# Allegro board AVRUSB500.brd
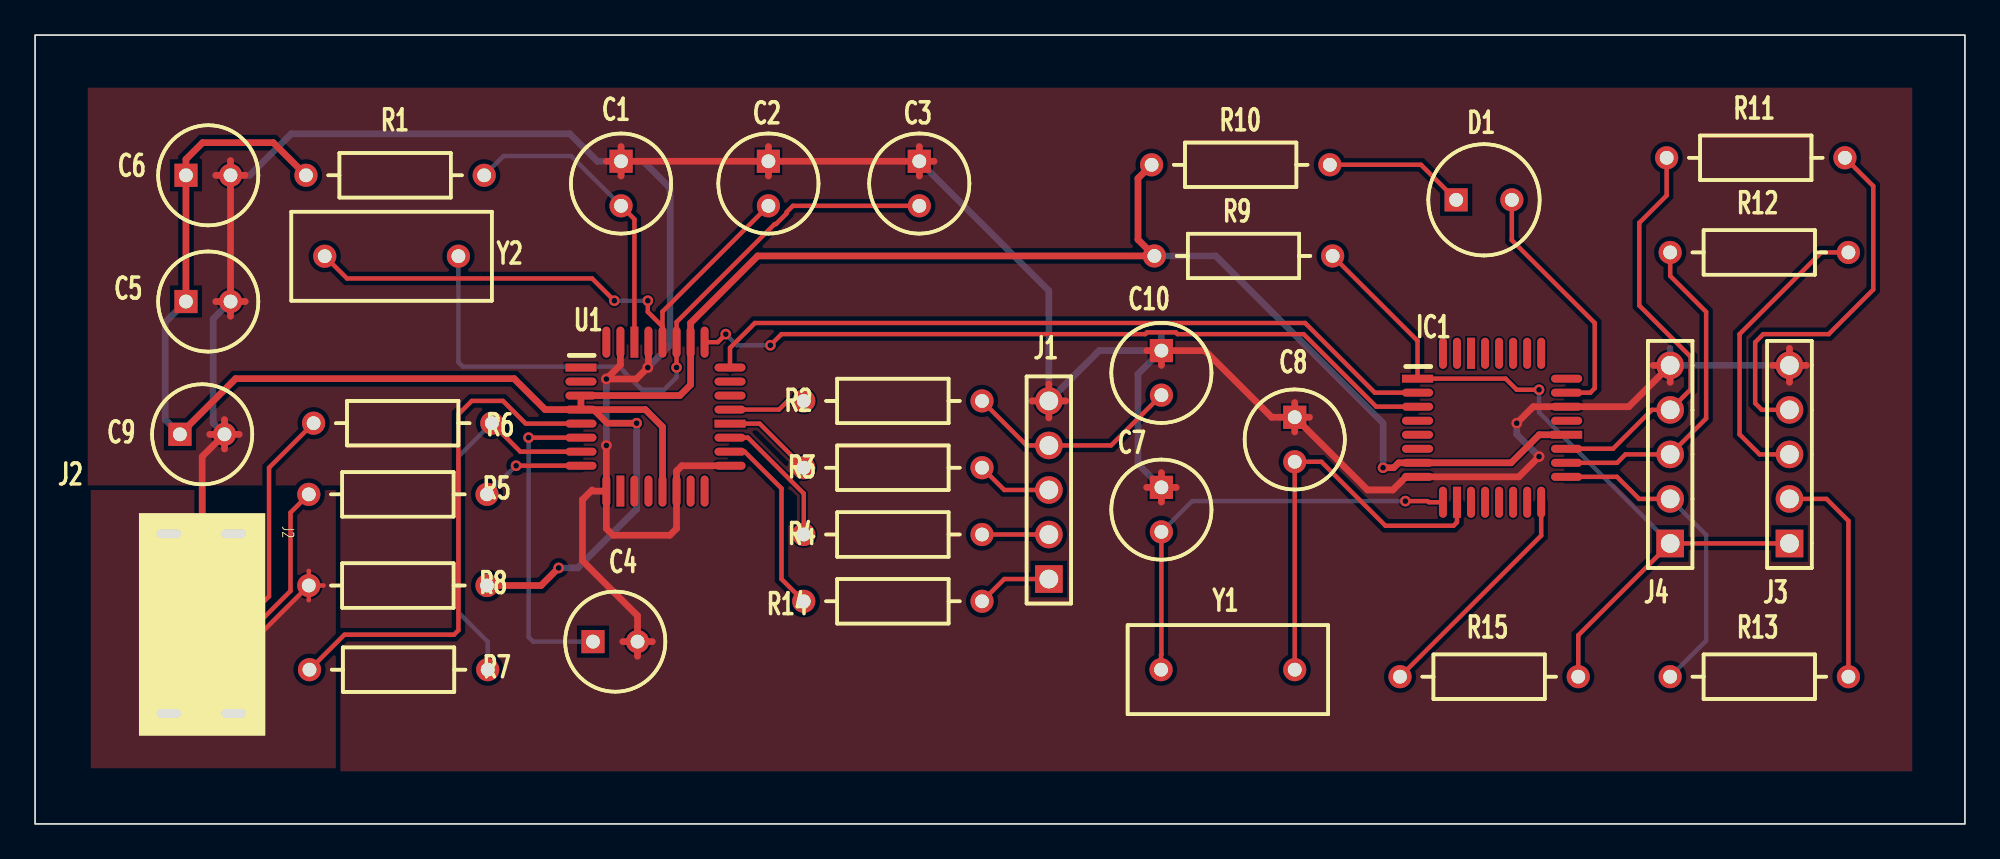
[diagram p0: board, top side]
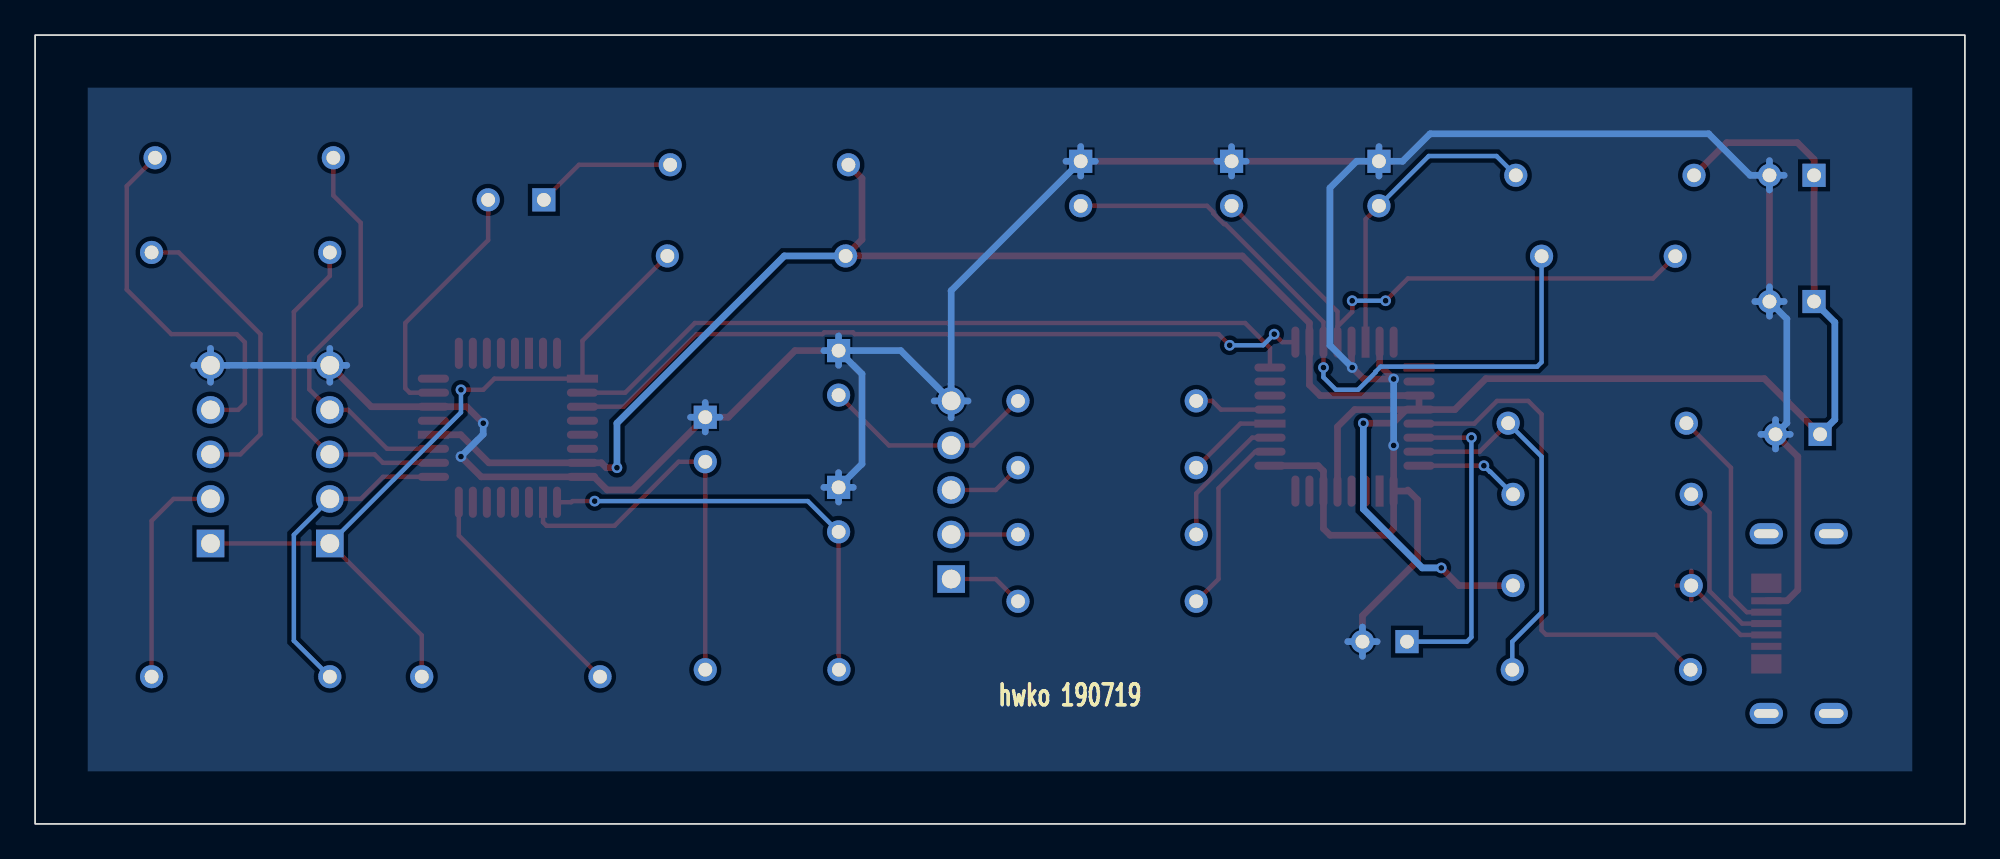
[diagram p1: board, bottom side, seen from below]

Outline 110 x 45 mm; copper layers: TOP, BOTTOM. Coordinates in mm from the lower left corner of the outline.
Outline path: rectangle 0,0 110,45

## Design rules (mm)
net group POWERNETS: nets GND VCC

## Placement (name value [footprint] x y rotation side)
C1  47nF  [CPCYL1D225LS100031]  33.4 37.8 270 top
C2  27pF  [CPCYL1D225LS100031]  41.8 37.8 270 top
C3  27pF  [CPCYL1D225LS100031]  50.4 37.8 270 top
C4  47nF  [CPCYL1D225LS100031]  31.8 10.4 0 top
C5  100nF  [CPCYL1D225LS100031]  8.6 29.8 0 top
C6  1uF  [CPCYL1D225LS100031]  8.6 37 0 top
C7  100nF  [CPCYL1D225LS100031]  64.2 19.2 270 top
C8  100nF  [CPCYL1D225LS100031]  71.8 23.2 270 top
C9  100nF  [CPCYL1D225LS100031]  8.26 22.23 0 top
C10  22nF  [CPCYL1D225LS100031]  64.2 27 270 top
D1  LED  [CYLD250LS125031]  81 35.6 0 top
IC1  ATmega8  [QUAD80M32WG900]  78.8 25.4 270 top
J1  bbpg_Bitbang  [BLKCON100VHTM1SQSW1005]  57.78 13.97 90 top
J2  USBA  [MICRO_USB]  7.62 11.43 270 top
J3  avrusb500_out  [BLKCON100VHTM1SQSW1005]  100 16 90 top
J4  firmware_in  [BLKCON100VHTM1SQSW1005]  93.2 16 90 top
NOREF  -  []  0 45 0 top
NOREF#2  -  []  110 0 90 top
R1  470  [AX400X100031]  25.6 37 180 top
R2  220  [AX400X100031]  43.81 24.13 0 top
R3  220  [AX400X100031]  43.81 20.32 0 top
R4  220  [AX400X100031]  43.81 16.51 0 top
R5  27  [AX400X100031]  15.6 18.8 0 top
R6  27  [AX400X100031]  15.88 22.86 0 top
R7  1.5k  [AX400X100031]  25.8 8.8 180 top
R8  2.2  [AX400X100031]  15.6 13.6 0 top
R9  10k  [AX400X100031]  63.8 32.4 0 top
R10  470  [AX400X100031]  73.8 37.6 180 top
R11  1k  [AX400X100031]  93 38 0 top
R12  220  [AX400X100031]  93.2 32.6 0 top
R13  1k  [AX400X100031]  93.2 8.4 0 top
R14  220  [AX400X100031]  43.81 12.7 0 top
R15  220  [AX400X100031]  77.8 8.4 0 top
U1  FT232BM  [QUAD80M32WG900]  31.11 26.04 270 top
Y1  3.6864Mhz  [RAD450X200LS300031]  71.8 8.8 180 top
Y2  6Mhz  [RAD450X200LS300031]  16.51 32.38 0 top

## Library data of the parts
C1-C5 C7-C10 = CAPACITOR NON-POL: alternate symbols: (SMDCAP)
C6 = CAPACITOR POL: alternate symbols: (SMDCAP)
D1 = LED
IC1 = ATmega8-DIL28_1
J1 J3 J4 = CON5
J2 = CON4_7
R1-R15 = R: alternate symbols: (SMDRES)
U1 = FT232BM_2
Y1 Y2 = ZTA

## Footprints (pads in the part's own frame, mm; a bottom-side part is the same pattern mirrored in y, then rotated)
AX400X100031
  round 1.321 hole 0.787: 1(0,0) 2(10.16,0)
BLKCON100VHTM1SQSW1005
  rect 1.575x1.575 hole 1.067: 1(0,0)
  round 1.575 hole 1.067: 2(2.54,0) 3(5.08,0) 4(7.62,0) 5(10.16,0)
CPCYL1D225LS100031
  rect 1.321x1.321 hole 0.787: 1(0,0)
  round 1.321 hole 0.787: 2(2.54,0)
CYLD250LS125031
  rect 1.321x1.321 hole 0.787: 1(0,0)
  round 1.321 hole 0.787: 2(3.175,0)
MICRO_USB
  oval 1.2x1.9 hole 0.5x1.4: (-5.125,3.7) (-5.125,0) (5.125,3.7) (5.125,0)
  rect 1.1x1.72 smd: (-2.3,3.7) (2.3,3.7)
  rect 0.4x1.72 smd: 1(-1.3,3.7) 2(-0.65,3.7) 3(0,3.7) 4(0.65,3.7) 5(1.3,3.7)
QUAD80M32WG900
  rect 0.457x1.778 smd: 1(0,0) 20(3.2,8.496)
  oval 0.457x1.778 smd: 2(0.8,0) 3(1.6,0) 4(2.4,0) 5(3.2,0) 6(4,0) 7(4.801,0) 8(5.601,0) 17(5.601,8.496) 18(4.801,8.496) 19(4,8.496) 21(2.4,8.496) 22(1.6,8.496) 23(0.8,8.496) 24(0,8.496)
  oval 1.778x0.457 smd: 9(7.048,1.448) 11(7.048,3.048) 12(7.048,3.848) 13(7.048,4.648) 14(7.048,5.448) 15(7.048,6.248) 16(7.048,7.048) 25(-1.448,7.048) 26(-1.448,6.248) 27(-1.448,5.448) 28(-1.448,4.648) 29(-1.448,3.848) 31(-1.448,2.248) 32(-1.448,1.448)
  rect 1.778x0.457 smd: 10(7.048,2.248) 30(-1.448,3.048)
RAD450X200LS300031
  round 1.321 hole 0.787: 1(0,0) 2(7.62,0)

## Nets
+5V: J2.4 R8.1
GND: C1.1 C2.1 C3.1 C4.2 C5.2 C6.2 C7.1 C8.1 C9.2 C10.1 IC1.8(GND) IC1.22(AGND) J1.5 J2.1 J3.5 J4.5 U1.9(GND) U1.14(PWRCTL) U1.17(GND1) U1.29(AGND) U1.31(TEST)
VCC: C5.1 C6.1 C9.1 IC1.7(VCC) IC1.20(AVCC) R1.2 R8.2 R9.1 R10.2 U1.3(VCC) U1.4(RESET#) U1.13(VCC-IO) U1.26(VCC1)
BMISO: J1.3 R3.2
BMOSI: J1.2 R4.2
BRESET: J1.1 R14.2
BSCK: C10.2 J1.4 R2.2
D+: J2.2 R6.1
D-: J2.3 R5.1
F_MISO: IC1.18((MISO) PB4) J4.3 R12.1
F_MOSI: IC1.17((OC2/MOSI) PB3) J4.2 R13.1
F_SCK: IC1.19((SCK) PB5) J4.4 R11.1
MISO: J3.3 R12.2
MOSI: J3.2 R13.2
RESET: IC1.1(PC6 (R\E\S\E\T\)) J3.1 J4.1 R9.2 R15.2
RXD: IC1.2(PD0 (RXD)) U1.24(RXD)
SCK: J3.4 R11.2
TXD: IC1.3(PD1 (TXD)) U1.25(TXD)
N02483: R6.2 R7.1 U1.7(USBDP)
N02615: R5.2 U1.8(USBDM)
N03527: C4.1 U1.6(3V3OUT)
N06839: R2.1 U1.21(DTR#)
N06967: R3.1 U1.20(DSR#)
N07033: R4.1 U1.19(DCD#)
N07247: R14.1 U1.18(RI#)
N11951: R7.2 U1.5(RSTOUT#)
N15182: C7.2 IC1.9(PB6 (XT1/TOSC1)) Y1.2
N15289: C8.2 IC1.10(PB7 (XT2/TOSC2)) Y1.1
N19734: D1.2(CATHODE) IC1.23((ADC0) PC0)
N20572: D1.1(ANODE) R10.1
N22544: IC1.16((SS/OC1B) PB2) R15.1
N41098: C3.2 U1.27(XTIN) Y2.2
N41106: C2.2 U1.28(XTOUT) Y2.1
N49165: C1.2 R1.1 U1.30(AVCC)

Pads without a net: IC1 4 5 6 11 12 13 14 15 21 24 25 26 27 28 29 30 31 32; J2 5; U1 1 2 10 11 12 15 16 22 23 32

## Via types
v1: diameter 0.61, hole 0.33, TOP to BOTTOM, 17 vias

## Routing (per net, layer and track width the routed paths; a pad name or vN(x,y) marks a point on that pad's centre or on a via; arc(x,y) is an arc through that point)
+5V: length 8
  TOP w0.254: J2.4 12.78,10.78 R8.1 ; 15.6,12.76 R8.1 ; R8.1 16.44,13.6 ; R8.1 15.6,14.44
GND: length 270.6
  TOP w0.381: J3.5 100,27.13 ; J3.5 100.97,26.16 ; J3.5 99.03,26.16 ; J3.5 100,25.19 ; 41.8,38.64 C2.1 41.8,36.96 ; C9.2 11.63,22.23 ; C9.2 10.79,21.39 ; C9.2 10.79,23.06 ; C9.2 9.96,22.23 ; 32.56,37.8 C1.1 ; C1.1 33.4,38.64 ; C1.1 33.4,36.96 ; 57.78,23.16 J1.5 ; J1.5 56.82,24.13 ; J1.5 57.78,25.1 ; J1.5 58.75,24.13 ; C6.2 11.98,37 ; C6.2 11.14,37.84 ; C6.2 10.3,37 ; 34.34,9.56 C4.2 ; C4.2 35.18,10.4 ; C4.2 33.5,10.4 ; 64.2,18.36 C7.1 ; C7.1 64.2,20.04 ; C7.1 63.36,19.2 ; C7.1 65.04,19.2 ; 63.36,27 C10.1 64.2,26.16 ; C8.1 72.64,23.2 ; C8.1 71.8,22.36 ; C8.1 71.8,24.04 ; C5.2 11.98,29.8 ; C5.2 10.3,29.8 ; C5.2 11.14,28.96 ; C3.1 50.4,38.64 ; C3.1 51.24,37.8 ; C3.1 50.4,36.96 ; 93.2,25.19 J4.5 92.23,26.16
  TOP w0.382: 32.56,18.99 32.56,16.85 32.95,16.47 36.18,16.47 36.56,16.85 U1.14 36.56,20.13 36.87,20.43 U1.17 ; 32.56,18.99 31.81,18.99 ; 32.56,18.99 v1(32.56,21.59) ; C3.1 C2.1 C1.1 ; C6.2 C5.2 ; J2.1 10.14,12.73 9.53,13.35 9.53,20.95 C9.2 ; C4.2 34.34,11.88 31.2,15.02 31.2,18.5 31.75,19.05 ; v1(85.72,20.95) 84.57,19.8 IC1.8 78.14,19.8 77.39,19.05 75.95,19.05 C8.1 70.48,23.2 66.69,27 C10.1 ; U1.29 34.96,26.07 v1(34.92,26.04) 34.27,25.38 v1(32.56,25.38) 33.36,26.18 U1.31 ; v1(84.45,22.86) 85.39,23.8 IC1.22 90.84,23.8 J4.5
  BOTTOM w0.381: 56.82,24.13 J1.5 ; J1.5 57.78,23.16 ; J1.5 58.75,24.13 ; C2.1 41.8,38.64 ; C2.1 42.64,37.8 ; C2.1 41.8,36.96 ; C2.1 40.96,37.8 ; C5.2 11.98,29.8 ; C5.2 10.3,29.8 ; C5.2 11.14,28.96 ; C5.2 11.14,30.64 ; C4.2 34.34,11.24 ; C4.2 33.5,10.4 ; C4.2 34.34,9.56 ; C4.2 35.18,10.4 ; J3.5 100,27.13 ; J3.5 100.97,26.16 ; J3.5 100,25.19 ; C10.1 65.04,27 ; C10.1 64.2,27.84 ; C10.1 64.2,26.16 ; 10.3,37 C6.2 ; C6.2 11.14,36.16 ; C6.2 11.14,37.84 ; J4.5 93.2,27.13 ; J4.5 92.23,26.16 ; J4.5 93.2,25.19 ; 64.2,18.36 C7.1 ; C7.1 63.36,19.2 ; C7.1 65.04,19.2 ; C7.1 64.2,20.04 ; 71.8,22.36 C8.1 ; C8.1 72.64,23.2 ; C8.1 70.96,23.2 ; C8.1 71.8,24.04 ; C3.1 51.24,37.8 ; C3.1 50.4,38.64 ; C3.1 49.56,37.8 ; C3.1 50.4,36.96 ; 33.4,38.64 C1.1 33.4,36.96 ; C9.2 10.79,23.06 ; C9.2 9.96,22.23 ; C9.2 11.63,22.23 ; C9.2 10.79,21.39
  BOTTOM w0.382: J4.5 J3.5 ; C5.2 10.15,28.81 10.15,22.87 C9.2 ; v1(84.45,22.86) 84.45,22.23 v1(85.72,20.95) ; v1(32.56,21.59) v1(32.56,25.38) ; C6.2 12.23,37 14.61,39.37 30.48,39.37 32.05,37.8 C1.1 34.67,37.8 36.2,36.28 36.2,27.3 v1(34.92,26.04) ; C7.1 62.87,20.54 62.87,25.66 C10.1 60.66,27 J1.5 57.78,30.41 C3.1
VCC: length 151.7
  TOP w0.382: v1(34.29,22.86) 32.61,22.86 31.84,23.64 ; R8.2 28.84,13.6 v1(29.84,14.61) ; C9.1 11.43,25.4 27.3,25.4 29.07,23.64 U1.4 ; U1.4 U1.3 36.75,24.43 37.36,25.05 U1.26 37.36,28.57 41.19,32.4 R9.1 62.87,33.34 62.87,36.83 R10.2 ; U1.4 31.84,23.64 ; v1(76.83,20.32) 77.44,20.32 77.72,20.6 84.13,20.6 85.73,22.2 IC1.20 ; 31.84,23.64 34.78,23.64 35.76,22.66 U1.13 ; C5.1 C6.1 8.6,37.91 9.55,38.86 13.58,38.86 R1.2
  BOTTOM w0.382: v1(34.29,22.86) 34.29,17.96 30.93,14.61 v1(29.84,14.61) ; v1(76.83,20.32) 76.83,22.86 67.3,32.4 R9.1 ; C9.1 7.41,23.07 7.41,28.61 C5.1
BMISO: length 4.3
  TOP w0.254: J1.3 55.24,19.05 53.98,20.32
BMOSI: length 3.8
  TOP w0.254: 53.98,16.51 J1.2
BRESET: length 4.3
  TOP w0.254: 53.98,12.7 55.24,13.97 J1.1
BSCK: length 12.5
  TOP w0.254: 53.98,24.13 56.52,21.59 J1.4 61.33,21.59 C10.2
D+: length 13.3
  TOP w0.254: R6.1 13.34,20.32 13.34,12.98 12.43,12.08 J2.2
D-: length 10
  TOP w0.254: J2.3 12.7,11.43 14.56,13.29 14.56,17.76 R5.1
F_MISO: length 19.3
  TOP w0.254: R12.1 93.2,31.26 95.25,29.21 95.25,23.13 J4.3 90.65,21.08 90.17,20.6 87.3,20.6
F_MOSI: length 18.3
  TOP w0.254: J4.2 91.43,18.54 90.17,19.8 IC1.17
  BOTTOM w0.254: R13.1 95.25,10.45 95.25,16.49 J4.2
F_SCK: length 23.5
  TOP w0.254: R11.1 93,35.85 91.44,34.29 91.44,29.57 94.37,26.64 94.37,24.79 J4.4 92.16,23.62 89.94,21.4 IC1.19
MISO: length 17.2
  TOP w0.254: J3.3 98.3,21.08 97.16,22.23 97.16,27.94 101.81,32.6 R12.2
MOSI: length 12.8
  TOP w0.254: J3.2 102.11,18.54 103.36,17.29 R13.2
RESET: length 44.6
  TOP w0.254: R9.2 78.8,27.56 IC1.1 83.82,25.4 84.45,24.77 v1(85.72,24.77) ; R15.2 87.96,10.76 J4.1 J3.1
  BOTTOM w0.254: J4.1 85.72,23.48 v1(85.72,24.77)
RXD: length 42.5
  TOP w0.254: U1.24 39.61,27.16 41.03,28.57 72.39,28.57 76.37,24.6 IC1.2
SCK: length 21.8
  TOP w0.254: R11.2 104.78,36.38 104.78,30.48 102.23,27.94 98.51,27.94 98.04,27.48 98.04,24 98.42,23.62 J3.4
TXD: length 43.2
  TOP w0.254: v1(41.91,27.3) 42.55,27.94 63.28,27.94 63.38,28.04 65.02,28.04 65.12,27.94 72.31,27.94 76.45,23.8 IC1.3 ; U1.25 38.91,27.48 v1(39.37,27.94)
  BOTTOM w0.254: v1(39.37,27.94) 40.01,27.3 v1(41.91,27.3)
N02483: length 21.3
  TOP w0.254: R6.2 27.66,21.23 U1.7
  BOTTOM w0.254: R7.1 25.8,10.39 24.13,12.06 24.13,20.95 R6.2
N02615: length 6
  TOP w0.254: U1.8 v1(27.42,20.43)
  BOTTOM w0.254: v1(27.42,20.43) 27.07,20.08 27.04,20.08 R5.2
N03527: length 18.1
  TOP w0.254: U1.6 v1(28.13,22.04)
  BOTTOM w0.254: C4.1 28.38,10.4 28.13,10.65 v1(28.13,22.04)
N06839: length 4.4
  TOP w0.254: R2.1 42.9,24.13 42.41,23.64 U1.21
N06967: length 5.2
  TOP w0.254: R3.1 41.3,22.84 U1.20
N07033: length 7.9
  TOP w0.254: U1.19 40.63,22.04 43.81,18.85 R4.1
N07247: length 10.8
  TOP w0.254: R14.1 42.55,13.97 42.55,19.14 40.45,21.23 U1.18
N11951: length 29.6
  TOP w0.254: U1.5 27.96,22.84 26.67,24.13 24.89,24.13 24.13,23.37 24.13,11.05 23.88,10.79 17.64,10.79 R7.2
N15182: length 24.7
  TOP w0.254: Y1.2 64.18,9.65 64.2,9.67 C7.2 ; v1(78.11,18.41) 79.38,18.41 79.44,18.35 IC1.9
  BOTTOM w0.254: C7.2 65.95,18.41 v1(78.11,18.41)
N15289: length 23.8
  TOP w0.254: Y1.1 C8.2 73.32,20.66 76.97,17.01 80.85,17.01 81.05,17.21 IC1.10
N19734: length 14.4
  TOP w0.254: IC1.23 88.65,24.6 88.9,24.85 88.9,28.57 84.17,33.3 D1.2
N20572: length 8
  TOP w0.254: R10.1 79,37.6 D1.1
N22544: length 13.3
  TOP w0.254: R15.1 85.85,16.45 IC1.16
N41098: length 39.2
  TOP w0.254: v1(36.56,26.04) U1.27 36.56,28.63 42.16,34.22 42.23,34.22 42.84,34.83 42.84,34.9 43.2,35.26 C3.2
  BOTTOM w0.254: Y2.2 24.13,26.34 24.38,26.09 33.3,26.09 33.6,25.79 33.6,25.75 34.59,24.77 35.85,24.77 36.56,25.48 v1(36.56,26.04)
N41106: length 31.6
  TOP w0.254: v1(34.92,29.84) 34.92,29.21 35.76,28.37 ; 35.76,28.37 35.76,29.22 C2.2 ; 35.76,28.37 U1.28 ; v1(33.02,29.84) 31.75,31.11 17.78,31.11 Y2.1
  BOTTOM w0.254: v1(33.02,29.84) v1(34.92,29.84)
N49165: length 17.5
  TOP w0.254: U1.30 34.16,34.5 C1.2
  BOTTOM w0.254: C1.2 30.56,38.1 26.7,38.1 R1.1

## Copper pours and planes (outline as drawn; the poured copper is in the pictures)
+5V on TOP: 3.17,19.05 3.17,3.17 17.14,3.17 17.14,19.05 ; 2 cut-outs
GND on TOP: 3,3 3,42 107,42 107,3 ; 6 cut-outs
GND on BOTTOM: 3,3 3,42 107,42 107,3

## Text on the board
Ref Des/Silkscreen Bottom: hwko 190719
DIMENSION: FIGURE | SIZE | 0.33 | 0.7869 | 1.0671 | 1.4x0.5001 | DRILL CHART: TOP to BOTTOM | ALL UNITS ARE IN MILLIMETERS | PLATED | QTY | 17 | 56 | 15 | 4
